# Altium PCB Copy of NaiS802HD_0.6.PcbDoc (part 2 of 2)
Units mm, origin at the board's own origin, x right, y up, seen from the top; angles counter-clockwise.
Board outline 60.2 x 38 mm, 4 copper layers (Top, INT1, GND, Bottom), stack 0.965 mm thick; 171 components, 226 nets, 680 pads, 225 vias.
Unrouted connection lines stored in the file: 290.
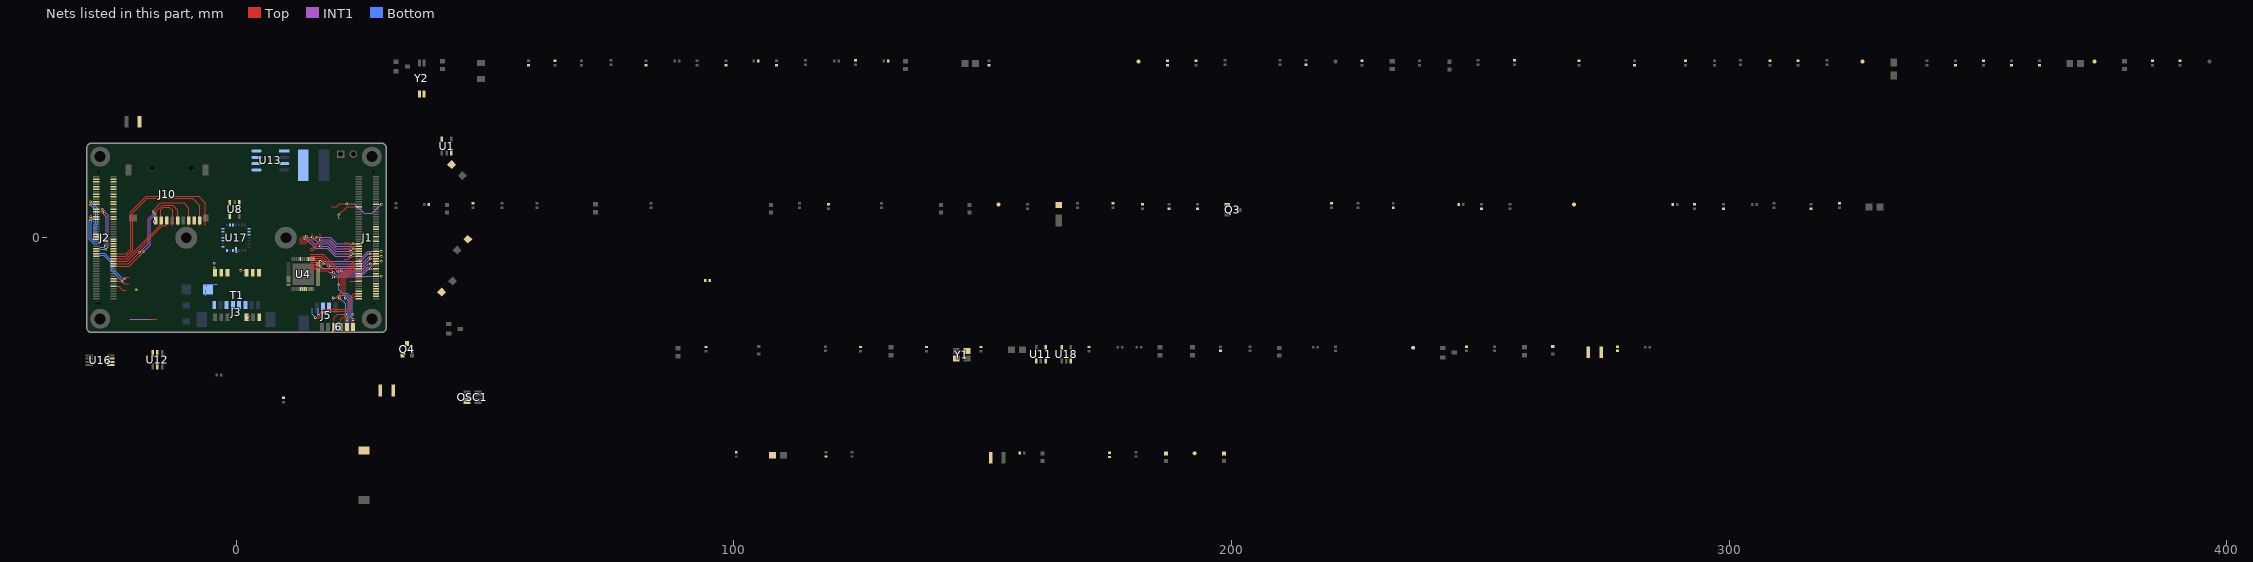
[diagram p3: the nets of this part, all layers, seen from the top]

## Via types
v1: diameter 0.5, hole 0.25, Top to Bottom, 225 vias

## Nets (pads, with @x,y where several pads share a name; then routed paths per layer and width w, separated by ;. In a path a pad name is that pad's centre, name@x,y a point inside that pad or via, vN(x,y) a via of type N, cw(c..) or ccw(c..) an arc to the next point about the centre after c; other vN are vias at no path point) (continued)
MDI1N: T1.8 U4.6
MDI1P: T1.6 U4.5
  other v1: 2.463,-16.469 2.463,-15.625
MDI2N: TP8.1 U4.8
MDI2P: TP7.1 U4.7
MDI3N: TP6.1 U4.11
MDI3P: TP5.1 U4.10
MIC_DATA_PDM: J1.1
MIC_SCLK_PDM: J1.7
MIPI_CSI_CLK0_DN: J2.74 U17.7 | length 10.2
  Top w0.2: J2.74@-28.095,5.75 v1(-26.925,5.75)
  INT1 w0.2: v1(-26.925,5.75) -26.925,5.025 -26.072,4.172 -26.072,-1.45 v1(-26.229,-1.607)
  Bottom w0.2: -27.355,-1.9 -26.522,-1.9 v1(-26.229,-1.607)
MIPI_CSI_CLK0_DP: J2.72 U17.8 | length 10.9
  Top w0.2: J2.72@-28.095,5.25 v1(-26.436,5.25)
  INT1 w0.2: v1(-26.436,5.25) -25.672,4.486 -25.672,-1.811 v1(-26.161,-2.3)
  Bottom w0.2: -27.355,-2.3 v1(-26.161,-2.3)
MIPI_CSI_CLK1_DN: J2.90
MIPI_CSI_CLK1_DP: J2.92
MIPI_CSI_D0_N: J2.68 U17.1 | length 7.8
  Top w0.2: v1(-29.2,4.25) J2.68@-28.095,4.25
  Bottom w0.1: -27.405,-0.75 -27.355,-0.7
  Bottom w0.2: v1(-29.2,4.25) -28.85,3.9 -28.85,3.414 -29.1,3.164 -29.1,-0.145 -28.545,-0.7 -27.355,-0.7
  other v1: 0.006,-2.816
MIPI_CSI_D0_P: J2.66 U17.2 | length 7.5
  Top w0.2: v1@-29.296,3.6 -29.219,3.6 -29.069,3.75 J2.66@-28.095,3.75
  Bottom w0.2: v1(-29.3,3.6) -29.5,3.4 -29.5,-0.311 -28.711,-1.1 -27.645,-1.1 -27.62,-1.125
MIPI_CSI_D1_N: J2.80 U17.4 | length 9.2
  Top w0.2: v1(-29.2,7.25) J2.80@-28.095,7.25
  Bottom w0.2: v1(-29.2,7.25) -27.8,5.85 -27.8,2.8 -28.095,2.505 -28.095,1.25 -28.1,1.245 -28.1,0.617 -27.983,0.5 -27.355,0.5
MIPI_CSI_D1_P: J2.78 U17.5 | length 9.3
  Top w0.2: v1(-29.3,6.6) -29.219,6.6 -29.069,6.75 J2.78@-28.095,6.75
  Bottom w0.2: v1(-29.3,6.6) -28.2,5.5 -28.2,2.966 -28.495,2.671 -28.495,2.452 ; -28.5,2.452 -28.5,0.381 -28.219,0.1 -27.355,0.1
MIPI_CSI_D2_N: J2.84 U17.10
MIPI_CSI_D2_P: J2.86 U17.11
MIPI_CSI_D3_N: J2.96 U17.13
MIPI_CSI_D3_P: J2.98 U17.14
MIPI_CSI_I2C_SCL: J2.17 R54.2 U17.19 | length 11.3
  Top w0.2: J2.17@-24.645,-8.25 v1(-22.31,-8.25) -22.03,-7.97 -21.455,-7.97
  Bottom w0.2: -27.355,-3.1 -26.436,-3.1 -24.645,-4.891 -24.645,-6.322 -22.717,-8.25 v1(-22.31,-8.25)
MIPI_CSI_I2C_SDA: J2.15 R53.2 U17.20 | length 11.2
  Top w0.2: J2.15@-24.595,-8.7 J2.15@-24.645,-8.75 v1(-22.895,-8.75) ; v1@-22.768,-8.877 v1(-22.895,-8.75) ; -21.455,-9.192 -22.453,-9.192 v1(-22.895,-8.75)
  Bottom w0.2: -27.355,-3.5 -26.602,-3.5 -25.093,-5.009 -25.093,-6.552 v1(-22.895,-8.75)
MIPI_DSI_CLKN: J2.83
MIPI_DSI_CLKP: J2.85
MIPI_DSI_D0N: J2.71
MIPI_DSI_D0P: J2.73
MIPI_DSI_D1N: J2.77
MIPI_DSI_D1P: J2.79
MIPI_DSI_D2N: J2.89
MIPI_DSI_D2P: J2.91
MIPI_DSI_D3N: J2.95
MIPI_DSI_D3P: J2.97
MIPI_SWITCH_SEL: J1.22
MMC1_CLK: J1.4
MMC1_CMD: J1.6
MMC1_D0: J1.14
MMC1_D1: J1.12
MMC1_D2: J1.10
MMC1_D3: J1.8
N21617464: D2.1 J3.1 | length 3.8
  Bottom w0.2: -6.078,-11.646 D2.1@-6.078,-10.425 ; D2.1@-6.078,-9.779 -6.028,-9.779 -5.878,-9.629 -5.878,-9.579 -5.66,-9.361 -3.734,-9.361
N21624957: C21.1 R51.1
N21624998: C22.1 R52.1
N21750160: C27.2 U8.4
N21750453: C31.2 U11.4
N21759423: L2.1 U1.3
N21759480: C6.2 R13.1 R15.2 U1.5
N21760304: D4.1 L5.1 U12.3
N21760358: R67.1 U12.2
N21760373: C34.2 U12.5
N21768495: TP9.1 U4.44
N21768552: L4.2 U4.32
  other v1: -20.095,-10.482
N21768580: R32.2 U4.48
N21776461: OSC1.3 R55.1
N21781792: U16.1 Y2.4
N21781837: U16.2 Y2.1
N21781846: BAT1.1 U16.3
N21811262: Q4.1 R46.2
N21811562: Q3.1 R47.2
N21818343: L6.1 U18.3
N21818417: C28.2 R58.1 R61.2 U18.5
N21823039: C26.1 R56.1 U17.21
N21823647: LD1.2 LD2.1
N21823649: LD2.2 LD3.1
N21823677: LD3.2 LD4.1
N21825549: C3.2 L1.1 U13.3
N21825600: R11.2 U13.7
N21825631: R12.2 R17.2 U13.5
N21825652: C9.1 U13.8
N21825662: C10.1 U13.6 | length 6.6
  Top w0.2: -17.134,-16.415 -15.917,-16.415
  INT1 w0.2: -21.306,-16.415 -15.917,-16.415
N21825703: C10.2 R16.2
N218255250: C3.1 U13.1
POE_LINE_1_2+: R51.2 T1.15
POE_LINE_3_6-: R52.2 T1.10
QSPI_NAND_CLK: J2.41
QSPI_NAND_CS: J2.39
QSPI_NAND_IO0: J2.45
QSPI_NAND_IO1: J2.43
QSPI_NAND_IO2: J2.49
QSPI_NAND_IO3: J2.47
RESET_N: C19.1 Q4.3 R44.2 U4.13
RGMII_MDC: J1.20 R27.2 U4.14 | length 16.5
  Top w0.2: 14.946,-6.1 15.755,-6.1 16.33,-6.675 18.42,-6.675 19.299,-7.555 19.299,-7.556 19.563,-7.819 19.564,-7.819 v1(19.594,-7.85) ; J1.20@28.095,-7.75 v1(29.2,-7.75)
  INT1 w0.2: v1(19.594,-7.85) 19.615,-7.87 25.643,-7.87 25.763,-7.75 v1(29.2,-7.75)
  Bottom w0.2: 19.344,-8.1 v1(19.594,-7.85)
RGMII_MDIO: J1.26 R28.2 U4.15 | length 15.4
  Top w0.2: 14.946,-5.7 15.92,-5.7 16.495,-6.275 18.955,-6.275 19.618,-6.938 v1(19.581,-6.938) ; v1(27,-6.25) J1.26@28.095,-6.25
  INT1 w0.2: v1(19.581,-6.938) 20.113,-7.47 25.477,-7.47 26.697,-6.25 v1(27,-6.25)
  Bottom w0.2: 18.603,-6.938 v1(19.581,-6.938)
RGMII_RXC: J1.39 R36.2 U4.28 | length 15.9
  Top w0.2: 12.946,-1.3 12.946,-0.28 13.511,0.285 v1(14.136,0.285) ; 21.863,-2.21 21.754,-2.101 22.401,-2.101 v1(23.055,-2.755) J1.39@24.645,-2.755
  INT1 w0.2: v1(14.136,0.285) 15.671,-1.25 18.539,-1.25 20.043,-2.755 v1(23.055,-2.755)
RGMII_RXCTL: J1.35 R38.2 U4.27 | length 15.3
  Top w0.2: 13.346,-1.3 13.346,-0.517 v1(13.675,-0.188) ; 21.734,-4.427 21.863,-4.298 22.512,-4.298 v1(23.055,-3.755) J1.35@24.645,-3.755
  INT1 w0.2: v1(13.675,-0.188) 14.033,-0.188 15.996,-2.15 18.307,-2.15 19.912,-3.755 v1(23.055,-3.755)
RGMII_RXD0: J1.41 R42.1 U4.26 | length 13.5
  Top w0.2: 13.746,-1.3 13.746,-0.822 14.668,0.1 v1(15.346,0.1) 15.346,0.85 ; v1(23.55,-2.25) J1.41@24.645,-2.25
  INT1 w0.2: v1(15.346,0.1) 16.296,-0.85 18.704,-0.85 20.104,-2.25 v1(23.55,-2.25)
RGMII_RXD1: J1.45 R31.2 U4.25 | length 13.6
  Top w0.2: 14.146,-1.3 14.146,-0.988 14.784,-0.35 15.797,-0.35 v1(16.247,0.1) ; 21.754,-0.957 22.678,-0.957 22.971,-1.25 v1(23.55,-1.25) J1.45@24.645,-1.25
  INT1 w0.2: v1@16.347,0.1 18.886,0.1 20.236,-1.25 v1(23.55,-1.25)
RGMII_RXD2: J1.43 R30.2 U4.24 | length 12.3
  Top w0.2: 14.946,-2.1 14.956,-2.09 15.389,-2.09 15.39,-2.089 15.39,-2.084 16.174,-1.3 16.174,-1.171 v1(16.946,-0.4) 16.948,-0.398 16.948,0.85 ; v1(23.055,-1.755) J1.43@24.645,-1.755
  INT1 w0.2: v1(16.946,-0.4) 18.82,-0.4 20.175,-1.755 v1(23.055,-1.755)
RGMII_RXD3: J1.37 R29.2 U4.23 | length 12.5
  Top w0.2: 14.946,-2.5 15.545,-2.5 15.79,-2.255 15.79,-2.25 16.34,-1.7 v1(16.946,-1.7) ; 21.754,-3.251 22.97,-3.251 v1(23.55,-3.25) J1.37@24.645,-3.25
  INT1 w0.2: v1(16.946,-1.7) 16.955,-1.7 18.423,-1.7 19.973,-3.25 v1(23.55,-3.25)
RGMII_TXC: J1.30 U4.21 | length 15.1
  Top w0.2: 14.946,-3.3 17.493,-3.3 20.813,-6.62 v1(21.157,-6.62) ; v1(27,-5.25) J1.30@28.095,-5.25
  INT1 w0.2: v1(21.157,-6.62) 25.196,-6.62 26.566,-5.25 v1(27,-5.25)
RGMII_TXCTL: J1.32 U4.20 | length 17.7
  Top w0.2: 14.946,-3.7 17.257,-3.7 v1(20.414,-6.858) ; J1.32@28.095,-4.75 v1(29.2,-4.75)
  INT1 w0.2: v1(20.414,-6.858) 20.626,-7.07 25.312,-7.07 26.581,-5.8 27.1,-5.8 28.15,-4.75 v1(29.2,-4.75)
RGMII_TXD0: J1.36 U4.19 | length 16.8
  Top w0.2: 14.946,-4.1 16.986,-4.1 v1(18.586,-5.7) ; J1.36@28.095,-3.75 v1(29.2,-3.75)
  INT1 w0.2: v1(18.586,-5.7) 24.9,-5.7 26.85,-3.75 v1(29.2,-3.75)
RGMII_TXD1: J1.40 U4.18 | length 16.3
  Top w0.2: 14.946,-4.5 16.417,-4.5 16.668,-4.75 v1(16.946,-4.75) ; J1.40@28.095,-2.75 v1(29.2,-2.75)
  INT1 w0.2: v1(16.946,-4.75) 24.544,-4.75 26.544,-2.75 v1(29.2,-2.75)
RGMII_TXD2: J1.38 U4.17 | length 14.1
  Top w0.2: 14.946,-4.9 16.252,-4.9 16.602,-5.25 v1(17.5,-5.25) ; v1(27,-3.25) J1.38@28.095,-3.25
  INT1 w0.2: v1(17.5,-5.25) 24.61,-5.25 26.61,-3.25 v1(27,-3.25)
RGMII_TXD3: J1.34 U4.16 | length 14.3
  Top w0.2: 14.946,-5.3 16.086,-5.3 16.486,-5.7 v1(16.9,-5.7) ; v1(27,-4.25) J1.34@28.095,-4.25
  INT1 w0.2: v1(16.9,-5.7) 17.35,-6.15 18.795,-6.15 25.1,-6.15 v1(27,-4.25)
RXD_DEBUG: J1.5 J5.3 | length 12.5
  Top w0.2: v1(16.537,-15.597) 17.734,-14.4 22.5,-14.4 22.755,-14.145 22.755,-12.103 23.608,-11.25 J1.5@24.645,-11.25
  Bottom w0.2: 16.523,-14.18 16.537,-14.195 v1(16.537,-15.597)
SD2_CLK: J2.29 J10.5 R71.1 | length 27.6
  Top w0.2: J2.29@-24.645,-5.25 -21.671,-5.25 v1(-19.332,-2.911) ; v1(-16.679,5.236) -16.679,5.434 -15.112,7.001 -10.529,7.001 -9.459,5.931 -9.459,4.412 -9.459,2.377
  INT1 w0.2: v1(-19.332,-2.911) -17.6,-1.179 -17.6,3.794 -16.679,4.714 v1(-16.679,5.236)
SD2_CMD: J2.27 J10.3 R72.1 | length 25
  Top w0.2: J2.27@-24.645,-5.75 -21.441,-5.75 v1(-18.498,-2.807) ; v1(-16.229,4.717) -16.229,5.102 -14.777,6.554 -12.696,6.554 -11.665,5.523 -11.665,4.412 -11.665,3.118 -11.565,3.018 -11.565,2.402 -11.59,2.377
  INT1 w0.2: v1(-18.498,-2.807) -17.2,-1.509 -17.2,3.628 -16.229,4.598 v1(-16.229,4.717)
SD2_DATA0: J2.35 J10.7 R76.1 | length 31.3
  Top w0.2: J2.35@-24.645,-3.75 -22.039,-3.75 -20.759,-2.47 -20.759,5.019 -17.873,7.905 -8.705,7.905 -7.266,6.465 -7.266,4.412 -7.266,3.066 -7.333,2.998 -7.333,2.377
SD2_DATA1: J2.37 J10.8 R75.1 | length 32.8
  Top w0.2: J2.37@-24.645,-3.25 -22.105,-3.25 -21.159,-2.304 -21.159,5.185 -18.039,8.305 -7.51,8.305 -6.161,6.956 -6.161,4.412 -6.161,2.388 -6.15,2.377
SD2_DATA2: J2.31 J10.1 R74.1 | length 15.7
  Top w0.2: J2.31@-24.645,-4.75 -21.905,-4.75 -14.778,2.377 -14.025,2.377 -14.025,2.816 -13.866,2.976 -13.866,4.412
  other v1: -16.39,3.248
SD2_DATA3: J2.33 J10.2 R73.1 | length 21.4
  Top w0.2: J2.33@-24.645,-4.25 -21.973,-4.25 -15.152,2.572 -15.152,5.612 -14.635,6.129 -13.381,6.129 -12.761,5.509 -12.761,4.412 -12.761,3.156 -12.804,3.112 -12.804,2.377
SD2_DET: J10.CD R70.1 TVS2.1
SYS_LED: J1.78 R4.2 | length 13
  Top w0.2: 19.154,6.27 20.207,6.27 20.773,6.836 v1(22.228,6.836) ; J1.78@28.095,6.75 v1(29.2,6.75)
  INT1 w0.2: v1(22.228,6.836) 23.78,6.836 25.73,4.886 27.336,4.886 v1(29.2,6.75)
SYS_RST: C1.2 J1.75 | length 5.4
  Top w0.2: v1(20.654,4.592) 22.312,6.25 J1.75@24.645,6.25
  Bottom w0.2: v1(20.654,4.592) 20.654,3.903 20.691,3.866
TCK_1V8: J1.27 J6.3 R10.1 | length 17
  Top w0.2: J6.3@19.775,-17.7 19.775,-15.997 20.429,-15.343 v1(22.009,-15.343) ; J6.3@19.781,-17.694 J6.3@19.8,-17.675 ; 20.781,-12.667 v1(20.781,-12.007) 21.578,-11.21 21.578,-8.052 23.88,-5.75 J1.27@24.645,-5.75
  Bottom w0.2: v1(20.781,-12.007) 22.009,-13.235 v1(22.009,-15.343)
TDI_1V8: J1.25 J6.5 R9.1 | length 14
  Top w0.2: 21.978,-12.667 v1(21.978,-12.007) 21.978,-8.218 23.946,-6.25 J1.25@24.645,-6.25 ; J6.5@22.275,-17.7 22.323,-17.652 22.323,-16.505 v1(22.359,-16.469)
  Bottom w0.2: v1(21.978,-12.007) 22.549,-12.578 22.549,-15.851 22.359,-16.041 v1(22.359,-16.469)
TDO_1V8: J1.31 J6.4 | length 18.7
  Top w0.2: v1(20.654,-9.48) 20.654,-7.845 23.749,-4.75 J1.31@24.645,-4.75 ; J6.4@21.025,-17.7 21.025,-16.42 21.586,-15.859 22.989,-15.859 v1(23.485,-15.362)
  Bottom w0.2: v1(20.654,-9.48) 20.654,-10.425 21.33,-11.101 22.283,-11.101 22.654,-11.472 ; 22.655,-11.472 23.349,-12.167 23.349,-15.226 v1(23.485,-15.362)
TMS_1V8: J1.29 J6.6 R8.1 | length 20.5
  Top w0.2: 19.581,-12.667 19.581,-12.053 20.073,-12.053 20.12,-12.007 ; v1(19.581,-12.007) 20.12,-12.007 ; J6.6@23.525,-17.7 23.525,-16.469 v1(23.566,-16.429) ; J1.29@24.645,-5.25 23.814,-5.25 21.178,-7.886 21.178,-10.949 20.12,-12.007
  Bottom w0.2: v1@19.581,-12.053 v1@19.628,-12.007 ; v1(19.581,-12.007) v1@19.628,-12.007 ; v1(23.566,-16.429) 22.949,-15.813 22.949,-12.333 22.117,-11.501 20.626,-11.501 20.12,-12.007 v1@19.628,-12.007
TOUCH_I2C_SCL: J2.65
TOUCH_I2C_SDA: J2.67
TOUCH_INT: J1.58
TOUCH_RST: J1.48
TPRXN_CON: J3.4 T1.14
TPRXP_CON: J3.3 T1.16
  other v1: -4.377,-6.062 -4.377,-5.137
TPTXN_CON: J3.6 T1.9
TPTXP_CON: J3.5 T1.11 | length 1.2
  Top w0.2: v1(0.963,-6.553) 1.016,-6.5 T1.11@2.097,-6.5
TXD_DEBUG: J1.3 J5.2 | length 13.8
  Top w0.2: v1(15.948,-16.044) 15.951,-16.047 16.818,-16.047 18.065,-14.8 22.666,-14.8 23.155,-14.311 23.155,-12.328 23.733,-11.75 J1.3@24.645,-11.75
  Bottom w0.2: 15.273,-14.18 15.273,-15.369 v1(15.948,-16.044)
USB_OTG_DN: J1.21
USB_OTG_DP: J1.19
USB_OTG_EN: J2.11 TP4.1 | length 3
  Top w0.2: J2.11@-24.645,-9.75 -23.526,-9.75 -22.751,-10.525 -22.007,-10.525
USB_OTG_ID: J1.15 TP3.1 | length 1.7
  Top w0.2: 22.936,-8.75 J1.15@24.645,-8.75
VADJ_0: J2.36 J2.38 | length 0.5
  Top w0.2: J2.36@-28.095,-3.75 J2.38@-28.095,-3.25
VADJ_1: J2.40 J2.42 | length 0.5
  Top w0.2: J2.40@-28.095,-2.75 J2.42@-28.095,-2.25
VADJ_2: J2.50 J2.52 J2.54 | length 1
  Top w0.2: J2.50@-28.095,-0.25 J2.52@-28.095,0.25 J2.54@-28.095,0.75
VDD_CAM: BC21.2 BC26.2 FB6.2 FB7.2 U8.1 U8.3 U11.1 U11.3
WIFI_EN: J1.60
WIFI_WAKE_OUT: J1.52
XTAL_I: C17.2 U4.45 Y1.1
XTAL_O: C18.2 U4.46 Y1.3
pads on no net: D3.3 J1.M1 J1.M2 J2.6 J2.12 J2.48 J10.13 J10.14 OSC1.1 R57.2 U4.33 U4.38 U4.39 U4.40 U4.41 U4.42 U4.43 U16.7 U17.18 Y2.2 Y2.3
copper on no net: | length 585.7
  Top w0.2: v1(-31,12.624) -29.796,13.828 -24.567,13.828 -21.795,16.6 v1(-15.907,16.6) ; -20.555,-9.192 -20.555,-7.97 v1(-19.894,-7.97) ; -17.518,-8.183 -14.67,-8.183 -14.659,-8.193 ; -17.518,-7.283 -16.294,-7.283 ; -17.287,-15.915 -14.886,-15.915 -14.406,-16.394 -14.406,-17.201 ; v1(-17.137,-18) -17.137,-17.418 -17.134,-17.415 ; -16.298,-6.169 -16.298,-7.279 -16.294,-7.283 ; -14.659,-6.293 -14.635,-6.269 -14.635,-4.95 ; -14.342,-7.357 -14.416,-7.283 -16.294,-7.283 ; -12.882,-17.201 v1(-12.015,-17.201) ; -12.077,-6.275 -12.059,-6.293 ; v1(-12.059,-8.833) -12.059,-8.193 ; -9.479,-12.875 -9.479,-14.234 -8.217,-15.495 -6.679,-15.495 ; -8.85,-17.217 v1(-8.263,-17.217) ; -8.829,-12.875 -8.829,-14.248 -8.391,-14.686 -6.679,-14.686 ; -7.616,-3.039 -7.616,-1.328 v1(-7.587,-1.3) ; -7.561,-17.217 -7.545,-17.201 ; v1(-5.012,6.956) -4.688,7.28 2.463,7.28 ; v1(-5.012,8.785) -5.012,9.617 -3.879,10.75 6.761,10.75 10.261,7.25 11.35,7.25 13.845,7.25 13.857,7.262 ; -0.376,8.277 v1(-0.376,9.612) ; 2.247,-3.65 2.247,-4.698 2.374,-4.825 5.9,-4.825 6.729,-4.825 7.203,-5.3 8.946,-5.3 ; 2.696,-0.642 2.696,0.812 2.696,2.31 4.757,4.371 4.757,6.326 ; 3.749,-5.95 3.874,-5.825 5.904,-5.825 6.677,-5.825 6.802,-5.7 8.946,-5.7 ; v1(3.869,-16.994) 3.95,-16.994 4.072,-17.116 5.124,-17.116 5.825,-16.415 9.241,-16.415 11.746,-13.911 11.746,-7.3 ; v1(3.95,-10.623) 4.477,-11.15 9.03,-11.15 10.242,-9.938 10.242,-8.458 10.546,-8.155 10.546,-7.3 ; v1(4.035,-8.1) 4.035,-9.916 4.869,-10.75 8.865,-10.75 9.842,-9.772 9.842,-8.293 10.146,-7.989 10.146,-7.3 ; 5.621,0.812 v1(6.278,0.812) ; 5.638,-0.642 5.688,-0.692 v1(6.278,-0.692) ; v1(6.278,-14.462) 10.629,-14.462 11.346,-13.745 11.346,-7.3 ; 6.919,-8.581 6.919,-7.752 8.171,-6.5 8.946,-6.5 ; 7.046,-3.243 7.046,-3.705 8.241,-4.9 8.946,-4.9 ; v1(7.518,-6.275) 7.693,-6.1 8.946,-6.1 ; v1(8.649,-8.031) 9.362,-8.031 9.736,-7.657 9.736,-7.31 9.746,-7.3 ; v1(10.8,-8.6) 10.946,-8.454 10.946,-7.3 ; 11.35,8.15 12.145,8.15 v1(12.195,8.2) ; 12.146,-7.3 12.146,-9.127 12.538,-9.519 12.538,-10.609 12.703,-10.774 ; 12.538,-14.783 14.188,-13.133 14.188,-8.276 13.746,-7.834 13.746,-7.3 ; 12.538,-12.098 13.279,-11.356 13.279,-9.609 12.546,-8.875 12.546,-7.3 ; 12.546,-1.3 12.546,0.093 ; 12.55,-13.441 13.679,-12.311 13.679,-8.333 13.346,-8 13.346,-7.3 ; 12.946,-7.3 12.946,-8.419 13.046,-8.519 v1(13.046,-8.6) ; 14.146,-7.3 v1(14.696,-7.3) ; 14.946,-6.5 14.996,-6.55 15.515,-6.55 ; 14.946,-2.9 15.71,-2.9 15.91,-2.7 v1(16.246,-2.7) ; 15.325,-11.568 16.089,-11.568 v1(16.111,-11.545) ; 16.15,6.308 18.217,6.308 18.254,6.27 ; 16.948,1.75 v1(17.649,1.75) ; 17.734,-12.667 17.746,-10.673
  Top w0.3: 12.546,0.093 13.305,0.853
  Top w0.4: v1(-22.823,0.1) -22.823,0.816 ; -14.659,-8.193 -14.659,-8.833 -14.659,-9.458 -13.666,-9.458 -13.021,-10.102 -11.377,-10.102 ; -14.025,1.477 -10.563,1.477 ; v1(-13.312,-6.275) -12.077,-6.275 ; -12.882,-17.201 -12.882,-15.925 ; -12.059,-6.293 -7.616,-6.293 -7.616,-4.563 ; v1@-10.563,5.875 -10.563,1.477 ; -10.544,0.45 -10.563,0.469 -10.563,1.477 ; v1(-9.415,17.55) -9.415,15.84 v1(-8.315,14.74) ; v1(-8.263,-17.217) -7.561,-17.217 ; -4.885,1.477 -10.563,1.477 ; 13.305,0.853 13.56,1.108 v1(14.079,1.108) 14.079,1.721 14.05,1.75 ; 13.996,1.75 14.05,1.75 ; 16.948,1.75 14.05,1.75
  INT1 w0.2: v1(-29.6,-13.55) -29.596,-13.55 -29.333,-13.813 -23.909,-13.813 ; v1(-25.075,-14.402) -23.885,-14.402 ; v1(-22.823,-1.811) v1@-22.781,-1.769 ; -21.472,-16.815 -18.322,-16.815 v1(-17.137,-18) ; v1(8.241,4.311) 8.573,4.643 v1(16.64,4.643)
  INT1 w0.6: v1(-22.823,-1.811) v1(-22.823,-2.766) -22.823,-5.041 v1(-19.894,-7.97) -19.609,-8.255 -15.245,-8.255 v1(-14.667,-8.833) ; v1(-22.823,0.1) -22.823,7.901 v1(-21.823,8.901) ; v1@-22.781,-1.769 -19.908,1.104 v1(-19.615,1.104)
  Bottom w0.2: -31,-14.775 -29.744,-14.775 -28.782,-13.813 -25.664,-13.813 v1(-25.075,-14.402) ; -31,-13.525 -30.975,-13.55 v1(-29.6,-13.55) ; v1(-31,12.624) -31,13.525 ; -31,14.775 -29.73,14.775 -28.783,13.828 -25.257,13.828 -24.657,14.428 -23.217,14.428 -21.312,14.428 -20.028,13.145 -16.889,13.145 ; -27.355,-0.3 v1(-26.567,-0.3) ; -27.355,0.9 -26.776,0.9 ; -27.355,2.1 -26.776,2.1 -26.76,2.084 ; -25.14,-1.5 -24.645,-1.5 ; -24.645,-2.7 -22.889,-2.7 v1(-22.823,-2.766) -22.823,-3.354 -23.024,-3.556 ; -24.645,-2.3 -21.281,-2.3 ; -24.645,-1.9 -22.988,-1.9 -22.899,-1.811 v1(-22.823,-1.811) ; -24.645,-1.1 -21.228,-1.1 ; -24.645,0.1 v1(-22.823,0.1) ; -24.33,17.628 -23.217,17.628 v1(-21.983,17.628) ; -21.159,8.001 -21.109,7.951 -19.778,7.951 ; -21.027,9.969 -21.005,9.992 ; -20.328,-1.1 -20.324,-1.096 -18.604,-1.096 ; -19.968,-5.293 -19.937,-5.325 -18.768,-5.325 ; -19.778,6.9 -19.778,7.951 ; -19.778,8.029 -19.778,7.951 ; v1(-19.615,1.104) -18.604,1.104 -18.604,2.655 ; v1(-19.615,18.2) -18.612,18.2 ; -18.768,-6.466 -18.768,-5.325 ; -18.768,-5.293 -18.768,-5.325 ; -18.685,16.527 -18.612,16.6 -16.844,16.6 v1(-15.907,16.6) -15.664,16.6 -14.714,17.55 -13.115,17.55 ; -18.104,5.8 -18.096,5.808 -18.096,7.001 ; -18.096,7.951 -19.778,7.951 ; -17.25,-7.433 -17.25,-6.275 ; -17.25,-5.325 -18.768,-5.325 ; -16.844,18.2 v1(-15.871,18.2) ; v1(-16.493,7.001) -15.496,7.001 ; -16.423,15.051 -16.39,15.083 -15.99,15.083 -14.473,16.6 -13.115,16.6 ; -15.499,10.442 -15.499,9.669 v1(-15.496,9.665) -15.496,8.901 ; -14.65,-4.375 -14.632,-4.393 -13.832,-4.393 -13.312,-4.913 v1(-13.312,-6.275) -13.312,-7.468 ; -13.814,13.145 -12.498,13.145 -12.003,13.64 -10.495,13.64 -10.495,15.629 -10.515,15.65 ; -10.515,16.6 -8.672,16.6 ; -10.45,-1.875 -5.966,-1.875 -1.683,-6.158 -1.683,-7.309 -2.465,-8.091 -3.734,-8.091 ; -10.45,-0.625 -6.65,-0.625 -1.213,-6.062 -1.213,-9.364 -2.48,-10.631 -3.734,-10.631 ; -10.45,0.625 -7.335,0.625 -0.813,-5.896 -0.813,-12.748 -2.506,-14.441 -3.734,-14.441 ; -10.45,1.875 -8.585,1.875 -7.735,1.025 -7.169,1.025 -0.413,-5.731 -0.413,-14.857 -2.537,-16.981 -3.734,-16.981 ; -10.45,3.125 -5.664,3.125 -4.377,4.412 -4.377,8.15 v1(-5.012,8.785) ; -10.45,4.375 -5.984,4.375 -5.012,5.347 v1(-5.012,6.956) ; v1(-8.304,-1.3) v1(-7.587,-1.3) ; -2.29,11.265 v1(-2.29,12.42) ; -0.39,8.565 -0.39,9.598 v1(-0.376,9.612) ; -0.39,11.265 1.034,11.265 ; 1.034,10.04 1.034,11.265 ; 1.034,12.482 1.034,11.265 ; v1(1.934,8.692) 1.934,10.04 1.934,11.265 ; v1(3.869,-16.994) 5.155,-16.994 ; v1(3.95,-10.623) 5.134,-10.623 5.156,-10.645 ; v1(4.035,-8.1) 5.15,-8.1 5.156,-8.107 ; 4.035,12.073 6.145,12.073 ; 5.156,-14.455 5.163,-14.462 v1(6.278,-14.462) ; 5.156,-9.375 3.684,-9.375 3.146,-9.913 3.146,-15.409 3.461,-15.725 5.156,-15.725 8.245,-15.725 ; 7.25,-1.876 7.307,-1.876 ; 8.246,-17.146 8.246,-15.724 ; 8.636,-9.694 8.648,-9.683 ; 8.649,-9.683 10.242,-9.683 10.966,-9.683 11.346,-10.062 11.346,-12.915 9.146,-15.115 9.146,-15.724 ; 8.671,-6.275 8.696,-6.25 ; v1(10.8,-8.6) 10.8,-7.975 ; v1@13.046,-8.4 13.046,-7.975 ; 13.708,-2.5 13.771,-2.436 14.035,-2.7 v1(16.246,-2.7) ; 14.023,-14.18 14.023,-12.365 14.843,-11.545 v1(16.111,-11.545) ; v1(14.079,1.108) 14.079,1.685 14.584,2.189 ; 14.546,-6.684 14.696,-6.834 v1(14.696,-7.3) ; v1(16.64,4.643) 17.648,4.643 18.105,5.1 22.077,5.1 ; v1(17.649,1.75) 17.837,1.75 18.534,1.053 18.534,-5.057 17.703,-5.888 17.703,-6.938 17.703,-8.1 ; 20.626,8.092 20.787,7.931 ; 23.877,10.25 23.877,11.593 25.307,11.593 25.384,11.67 ; v1(24.079,-13.441) 24.079,-12.468 25.312,-12.468 ; 24.079,-11.568 24.079,-11.125 24.583,-10.621 24.583,-9.978 24.657,-9.904 ; 25.636,2 25.673,2.037 v1(26.465,2.037)
  Bottom w0.4: -22.823,8.901 v1(-21.823,8.901) -18.096,8.901 ; -21.281,-2.3 -21.274,-2.308 -21.274,-4.295 -21.194,-4.375 ; -21.212,-4.393 -21.194,-4.375 ; -21.027,8.929 -21.027,9.969 ; -17.25,-4.375 -21.194,-4.375 ; -14.65,-6.275 v1(-13.312,-6.275) ; -12.091,8.88 -10.57,8.88 v1(-10.57,5.867) ; -10.515,17.55 v1(-9.415,17.55) ; -8.315,13.34 v1(-8.315,14.74) ; 7.518,-5.262 v1(7.518,-6.275) 8.671,-6.275 ; v1(8.649,-8.031) 8.649,-7.41
  Bottom w0.6: -13.46,-1.734 -13.958,-2.232 -13.958,-2.919 -12.502,-4.375 -10.45,-4.375 ; -13.46,2.666 -13.46,10.937 -12.624,11.773 -6.579,11.773 -2.665,15.686 ; 8.649,-9.683 v1(8.649,-8.031)
  other v1: -19.934,-15.647 8.636,-12.299 7.605,-11.761 11.341,-5.115 12.67,-5.115 11.341,-3.862 12.67,-3.862 1.1,2.8 2.1,2.8 7.518,3.607 2.1,3.7 20.16,11.459 20.964,11.459 20.966,12.153 20.19,12.166

## Polygon pours and split planes (outlines as drawn)
+5.0V on INT1 "INT1-No Net" (solid, remove dead copper, pour order 31): 21.3,14.966 11.052,14.966 10.332,15.686 -8.838,15.686 -12.883,11.642 -12.882,0.876 -9.796,-2.21 -5.909,-2.21 -5.296,-1.597 -5.296,-0.419 -8.158,2.443 -8.158,6.711 -5.77,9.099 7.484,9.099 9.083,7.5 15.465,7.5 21.435,1.53 22.133,0.831 23.586,0.831 23.952,1.198 23.952,12.315
+3.3V on INT1 "INT1-No Net 1" (solid, pour order 29): 5.799,9.201 -8.899,9.201 -11.15,6.95 -11.15,2.722 -9.835,1.407 -5.847,1.407 -4.885,0.445 -4.885,-13.853 -6.061,-15.029 -11.964,-15.029 -12.558,-15.623 -12.558,-17.391 -12.295,-17.654 -2.993,-17.654 0.737,-13.441 9.85,-13.441 10.852,-12.175 16.327,-12.175 16.6,-11.957 16.606,-11.36 16.368,-11.15 3.648,-11.15 -0.263,-7.239 -0.263,-0.786 3.372,2.849 8.803,2.849 9.467,3.513 9.467,5.533
+1.8V on INT1 "INT1-+1.8V" (solid, pour order 39): 1.449,-15.216 1.224,-15.441 1.224,-16.47 1.9,-17.146 14.157,-17.146 17.297,-14.006 26.39,-14.006 26.61,-13.745 26.61,-12.99 26.39,-12.748 14.944,-12.748 12.274,-15.216
VDD_CAM on INT1 "INT1-VDD_CAM" (solid, pour order 41): -15.25,10.442 -16.298,9.393 -16.298,-6.332 -13.163,-9.467 -10.572,-9.467 -8.951,-7.845 -8.951,-5.94 -13.81,-1.081 -13.81,9.814 -14.437,10.442
DVDD33 on INT1 "dvdd33" (solid, remove dead copper, pour order 27): 6.538,2.28 5.315,1.193 5.315,-0.769 5.682,-1.135 6.538,-1.15 8.594,0.906 9.402,0.906 11.04,0.906 11.649,1.515 11.649,3.607 11.359,3.897 10.903,3.897 9.229,2.28
AVDD33 on INT1 "INT1-No Net 2" (solid, pour order 25): 8.275,-7.3 8.014,-7.562 8.014,-8.922 9.549,-10.456 14,-10.456 15.317,-9.14 15.317,-7.075 14.926,-6.684 14.465,-6.684 14.065,-7.085 14.065,-8.823 13.232,-9.656 10.507,-9.656 9.177,-8.326 9.177,-7.406 9.071,-7.3
AVDDL_1V2 on INT1 "INT1-AVDDL_1V2" (solid, remove dead copper, pour order 37): 7.415,-5.823 7.116,-6.122 7.116,-6.421 7.361,-6.665 9.184,-6.665 10.464,-7.945 10.464,-8.871 10.751,-9.158 13.053,-9.158 13.465,-8.746 13.465,-8.319 13.147,-8.001 11.52,-8.001 9.342,-5.823
GND on GND "GND" (solid, remove dead copper, pour order 19): -47.504,72.196 -47.504,27.528 39.881,27.528 39.881,73.275
GND on Top "Top-GND" (solid, remove dead copper, pour order 33): -39.504,68.9 -41.372,67.032 -41.372,32.832 -36.591,28.051 34.02,28.051 35.101,29.132 35.101,66.497 32.698,68.9
GND on Bottom "Bottom-GND" (solid, remove dead copper, pour order 35): -41.204,69.527 -42.48,68.25 -42.48,30.526 -40.632,28.678 27.444,28.678 28.525,29.759 28.525,67.124 26.122,69.527

## Keep-outs
Keep-Out Layer:
  the board outline again, w0.2

## Other copper
Top:
  region: 7.858,4.651 7.178,3.971 7.178,3.276 7.365,3.09 8.282,3.09 8.677,3.484 8.677,4.463 8.488,4.651
  region net TPRXP_CON: -4.919,-5.619 -5.327,-6.027 -5.769,-6.027 -6.063,-6.322 -5.777,-6.608 -4.194,-6.608 -3.879,-6.293 -3.879,-5.082 -4.211,-4.75 -4.595,-4.75 -4.919,-5.074
  region: -8.85,-1.12 -8.85,-1.445 -8.596,-1.7 -8.159,-1.7 -7.984,-1.875 -7.984,-2.671 -7.616,-3.039 -7.266,-2.689 -7.266,-1.721 -7.016,-1.471 -7.016,-1.067 -7.206,-0.876 -8.607,-0.876
  region net MDI1P: -9.813,-9.75 -10.036,-9.936 -10.036,-10.259 -9.813,-10.483 -0.662,-10.483 2.097,-13.243 2.097,-16.775 2.217,-16.894 2.646,-16.894 2.848,-16.693 2.848,-12.884 -0.286,-9.75 -0.813,-9.75
  region: 30.085,4.35
  region net +5.0V: 25.102,2.75 22.15,2.75 22.066,2.666 22.066,1.334 22.2,1.2 25.103,1.2 25.153,1.25 25.153,2.7
  region net GND: 10.012,3.909 10.297,4.172 11.588,4.172 12.151,3.609 12.151,-1.601 11.735,-1.601 11.735,-0.283 11.735,1.108 10.012,2.831
  region net GND: 11.246,-1.624 11.445,-1.624 11.445,0.439 10.288,1.597 10.091,1.597 9.801,1.307 9.801,1.019 11.246,-0.44
Bottom:
  region: -2.468,8.804 -2.537,8.735 -2.537,6.499 -1.913,5.875 -0.951,5.875 -0.757,6.069 -0.757,6.924 -1.233,7.4 -1.7,7.4 -2.1,7.8 -2.1,8.696 -2.212,8.808
  region: 7.468,-11.271 7.25,-11.472 7.25,-11.956 8.03,-12.736 8.754,-12.736 9.03,-12.459 9.03,-11.57 8.731,-11.271
  region net +5.0V: 22.3,2.7 22,2.4 22,1.4 22.2,1.2 23.668,1.2 24.035,1.567 24.035,3.765 24,3.8 23.7,3.8 23.6,3.7 23.6,3.2 23.1,2.7
  region: 5.65,19.8 6.138,20.288 6.138,22.112 4.75,23.5 3.05,23.5 2.05,22.5 2.05,20.3 2.55,19.8
  region net GND: 10.167,3.991 9.671,3.991 9.671,2.991 11.114,1.548 11.416,1.548 11.695,1.891 11.695,2.341
  region net GND: 9.45,0.983 9.45,1.085 9.911,1.546 10.41,1.546 11.146,0.81 11.146,0.403 10.827,0.084 9.518,0.084
  region: 3.805,6 3.1,6 1.9,4.8 0.5,4.8 0.297,4.597 0.297,3.097 1.108,2.286 2.604,2.286 3.805,3.487
  region: 21.038,10.558 21.735,11.255 21.735,15.189 21.495,15.429 19.929,15.429 19.735,15.235 19.735,11.055 20.245,10.545
  region: 7.427,-1.433 8.362,-2.369 12.107,-2.362 12.284,-2.538 12.284,-2.87 12.124,-3.029 9.763,-3.029 9.128,-3.664 7.236,-3.664 7.08,-3.508 7.08,-2.34 5.135,-2.343 5.135,-1.433